# Altium PCB 175-00017_rev2, Two Axis Stepper Driver Apps Board.PcbDoc
Units mil, origin at the board's own origin, x right, y up, seen from the top; angles counter-clockwise.
Board outline 1377.95 x 3149.61 mil, 6 copper layers (Top (*.GTL), GND1 (*.GP1), Mid-Layer 1 (*.G1), +48V (*.GP2), GND2(*.GP3), Bottom Layer (*.GBL)); 16 components, 41 nets, 198 pads, 75 vias.
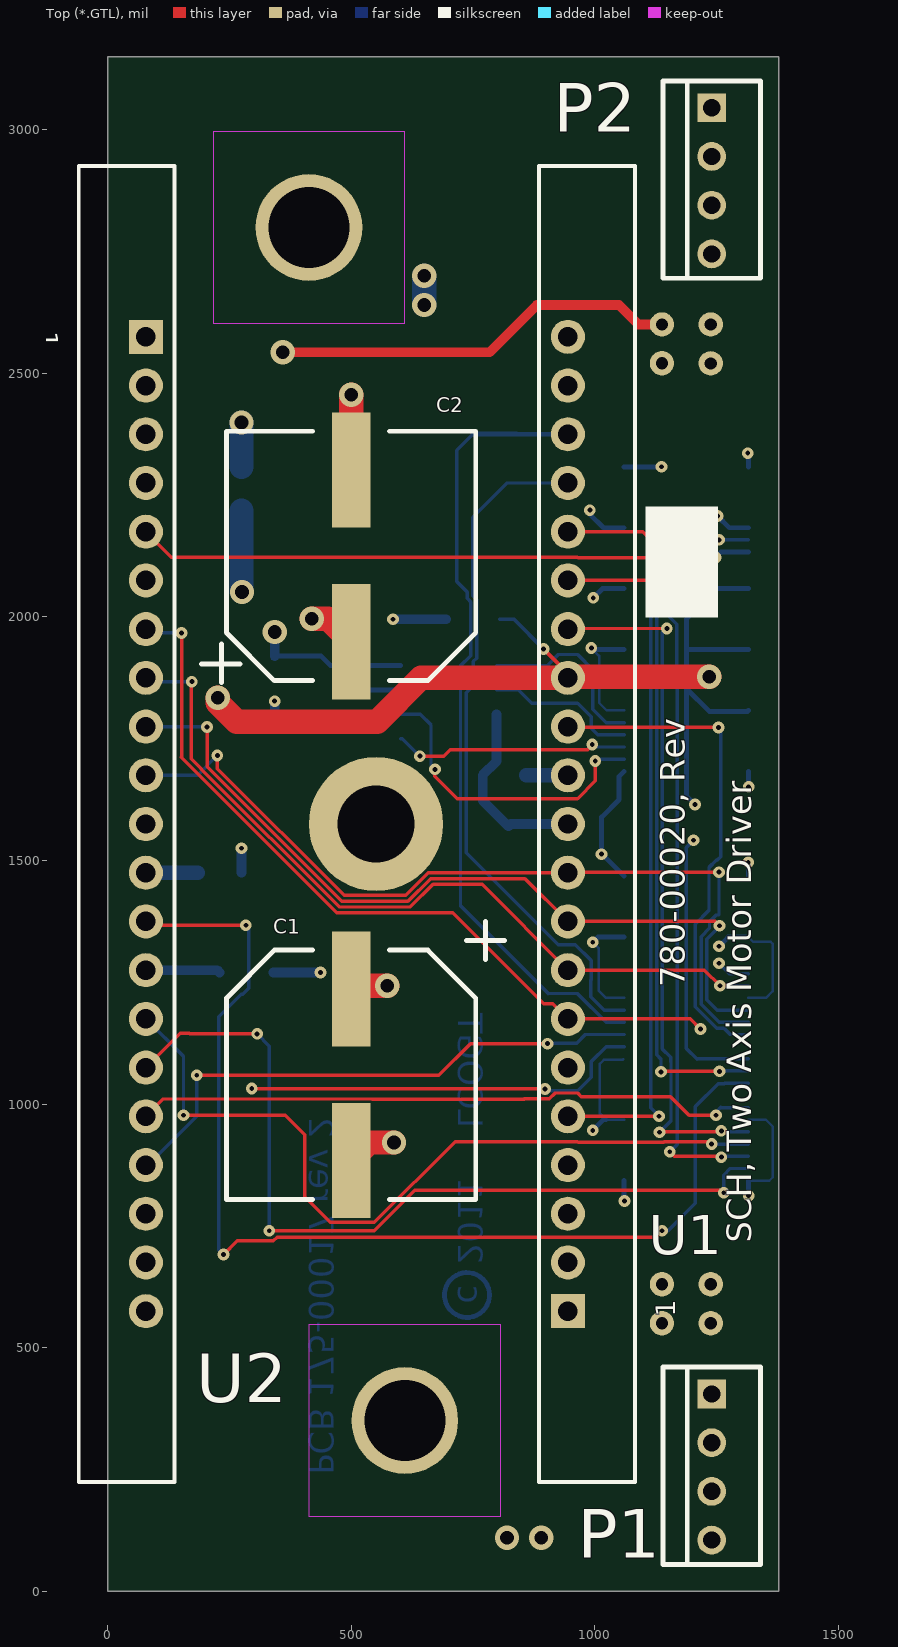
[diagram p0: Top (*.GTL) view]
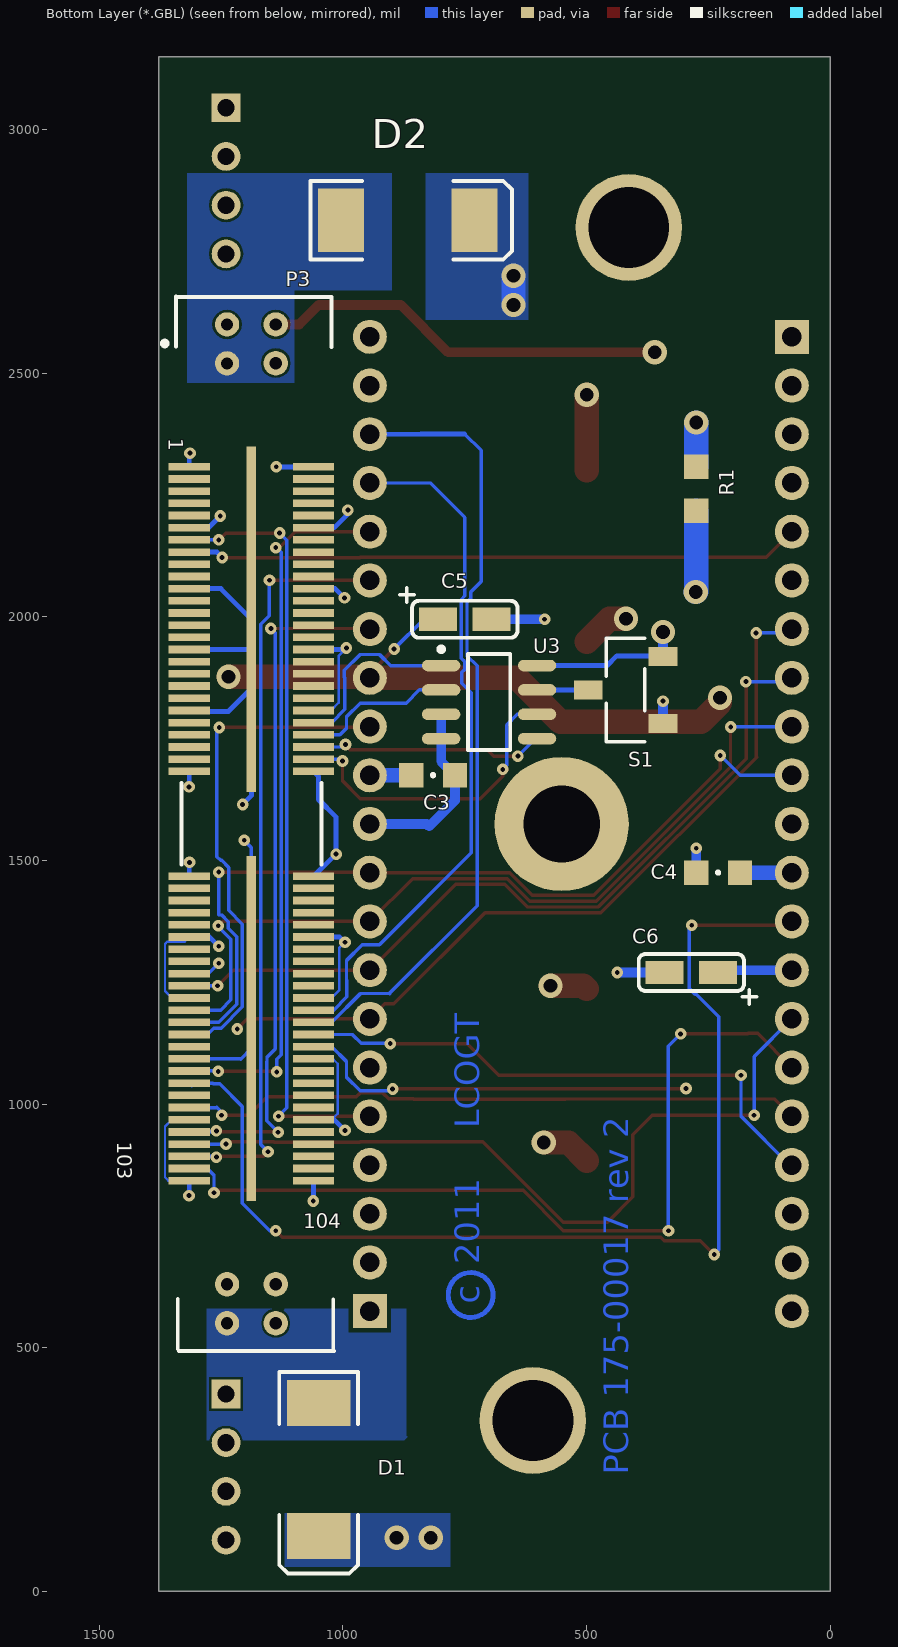
[diagram p1: Bottom Layer (*.GBL) view, seen from below]
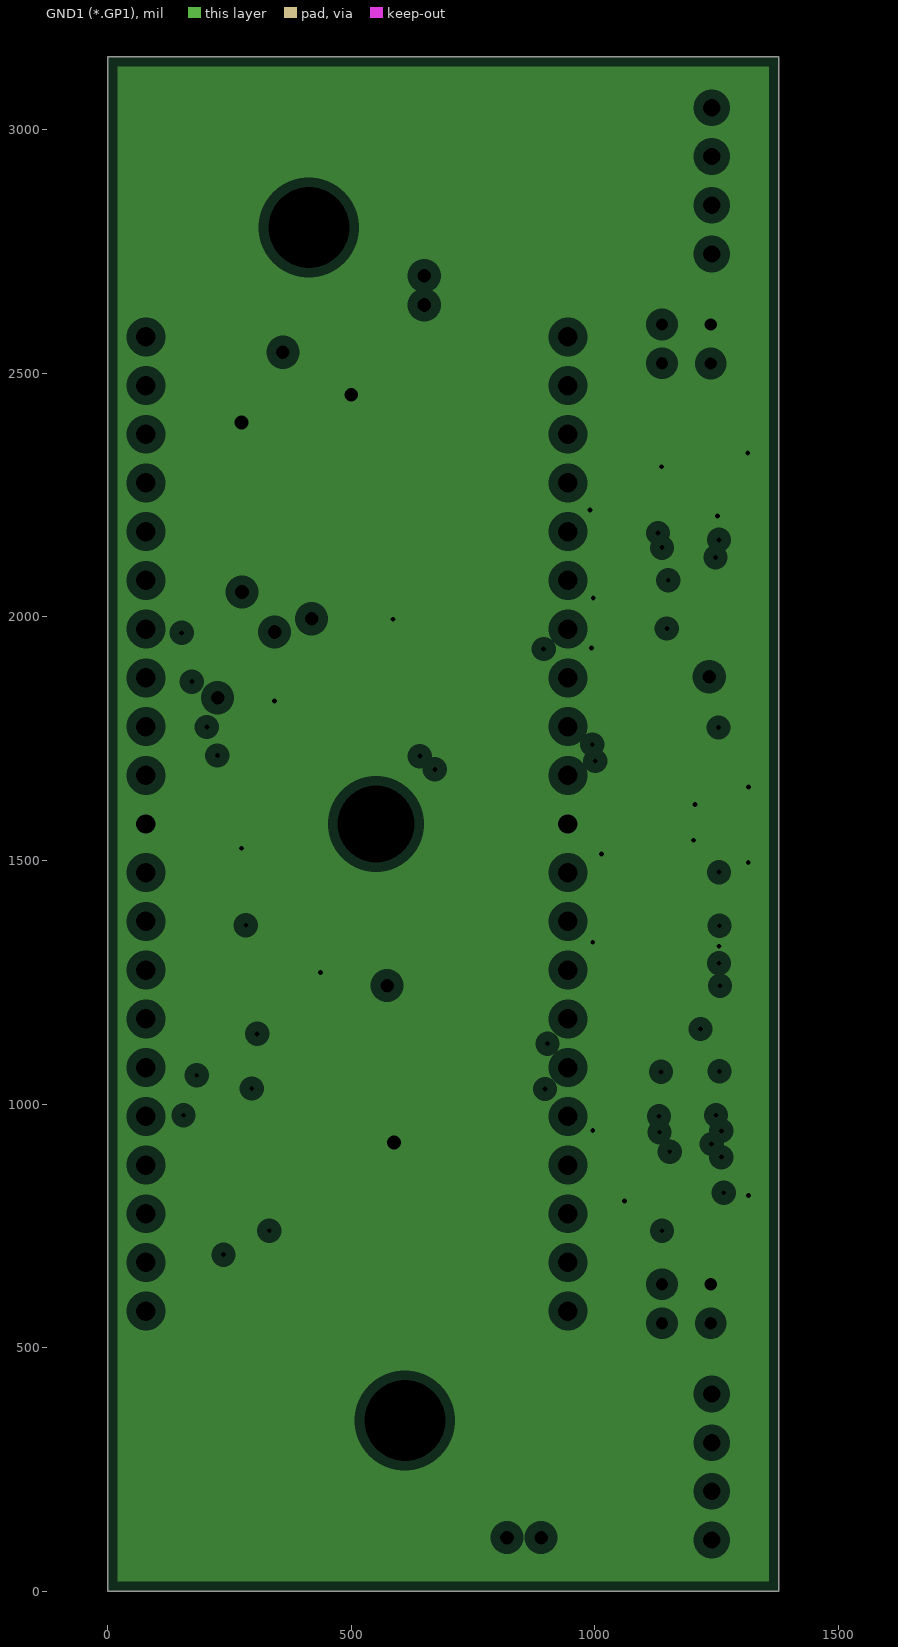
[diagram p2: GND1 (*.GP1), clearances drawn from the general rule]
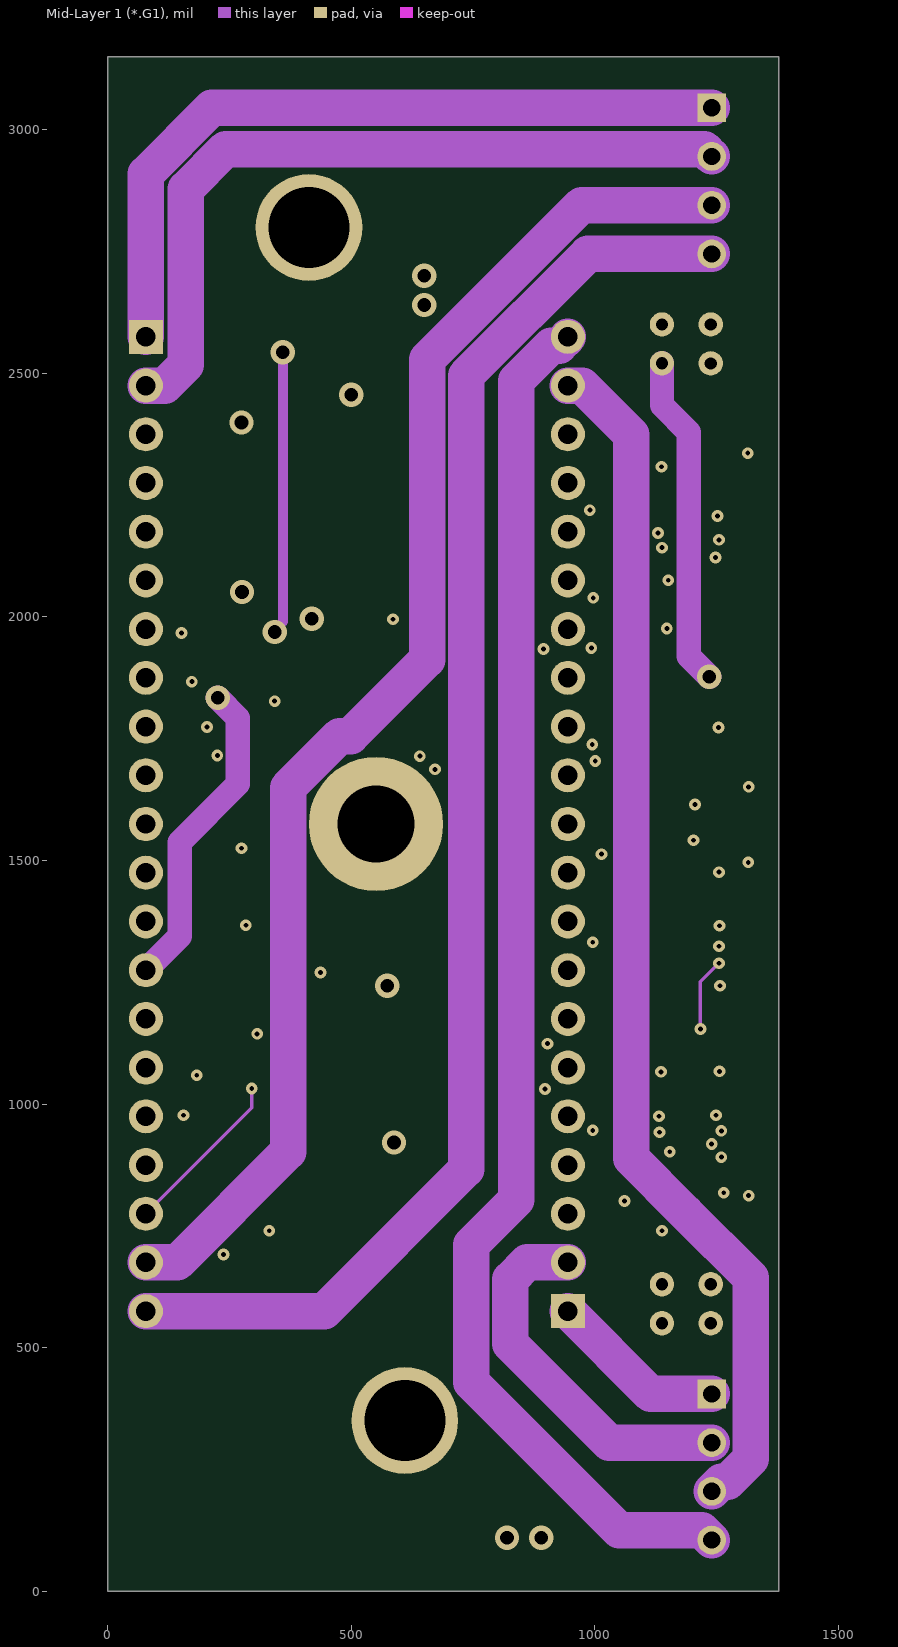
[diagram p3: Mid-Layer 1 (*.G1)]
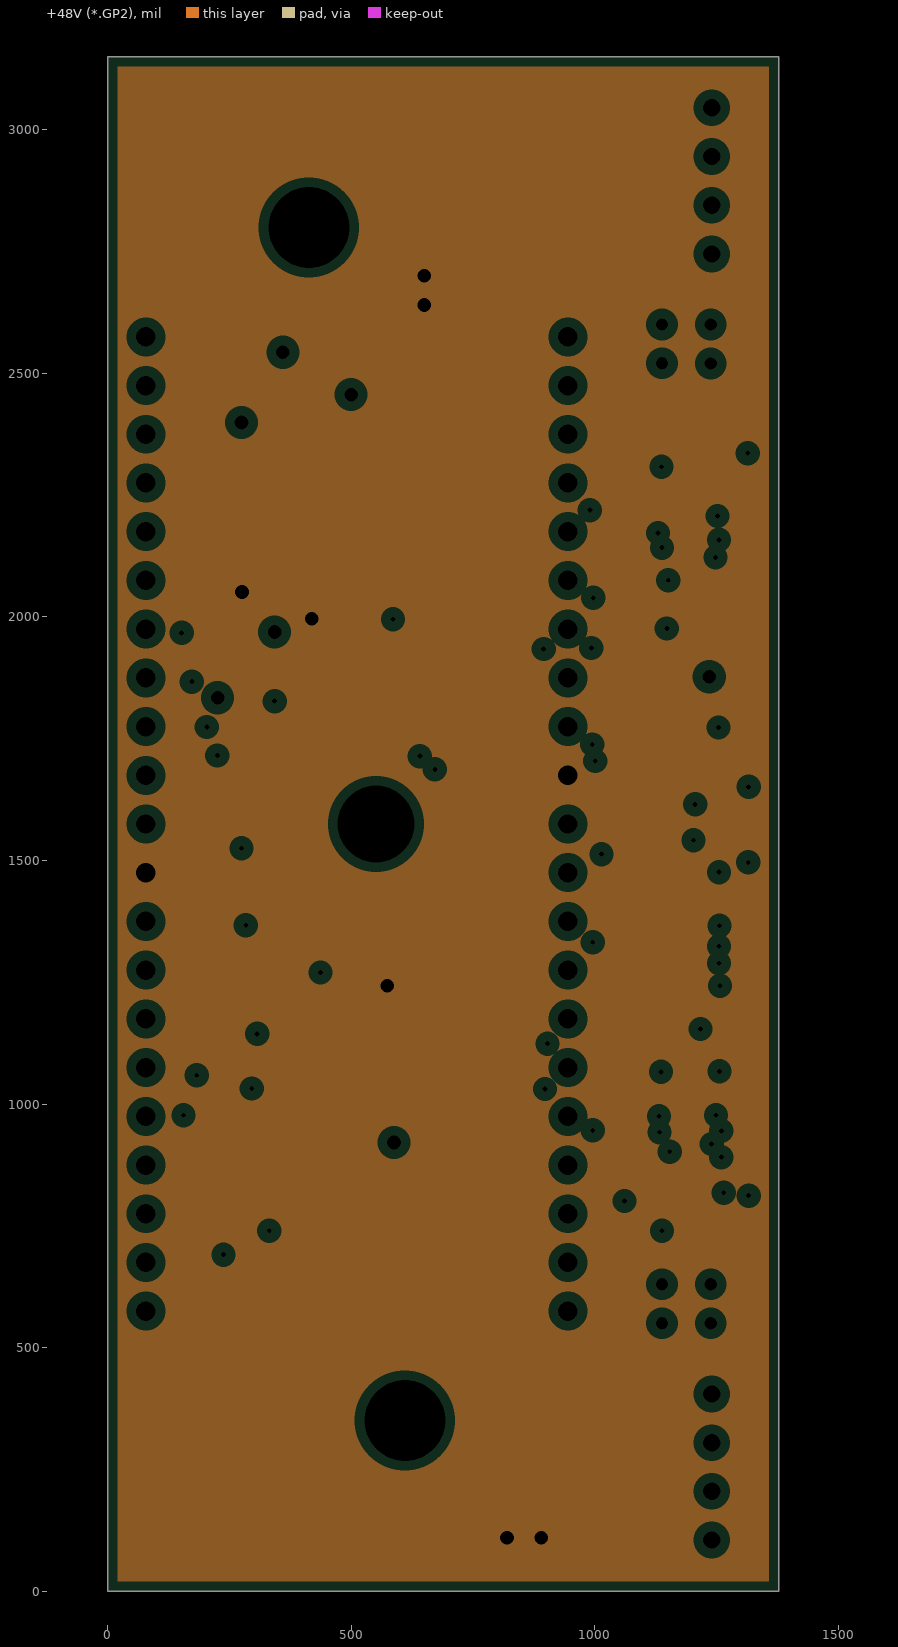
[diagram p4: +48V (*.GP2), clearances drawn from the general rule]
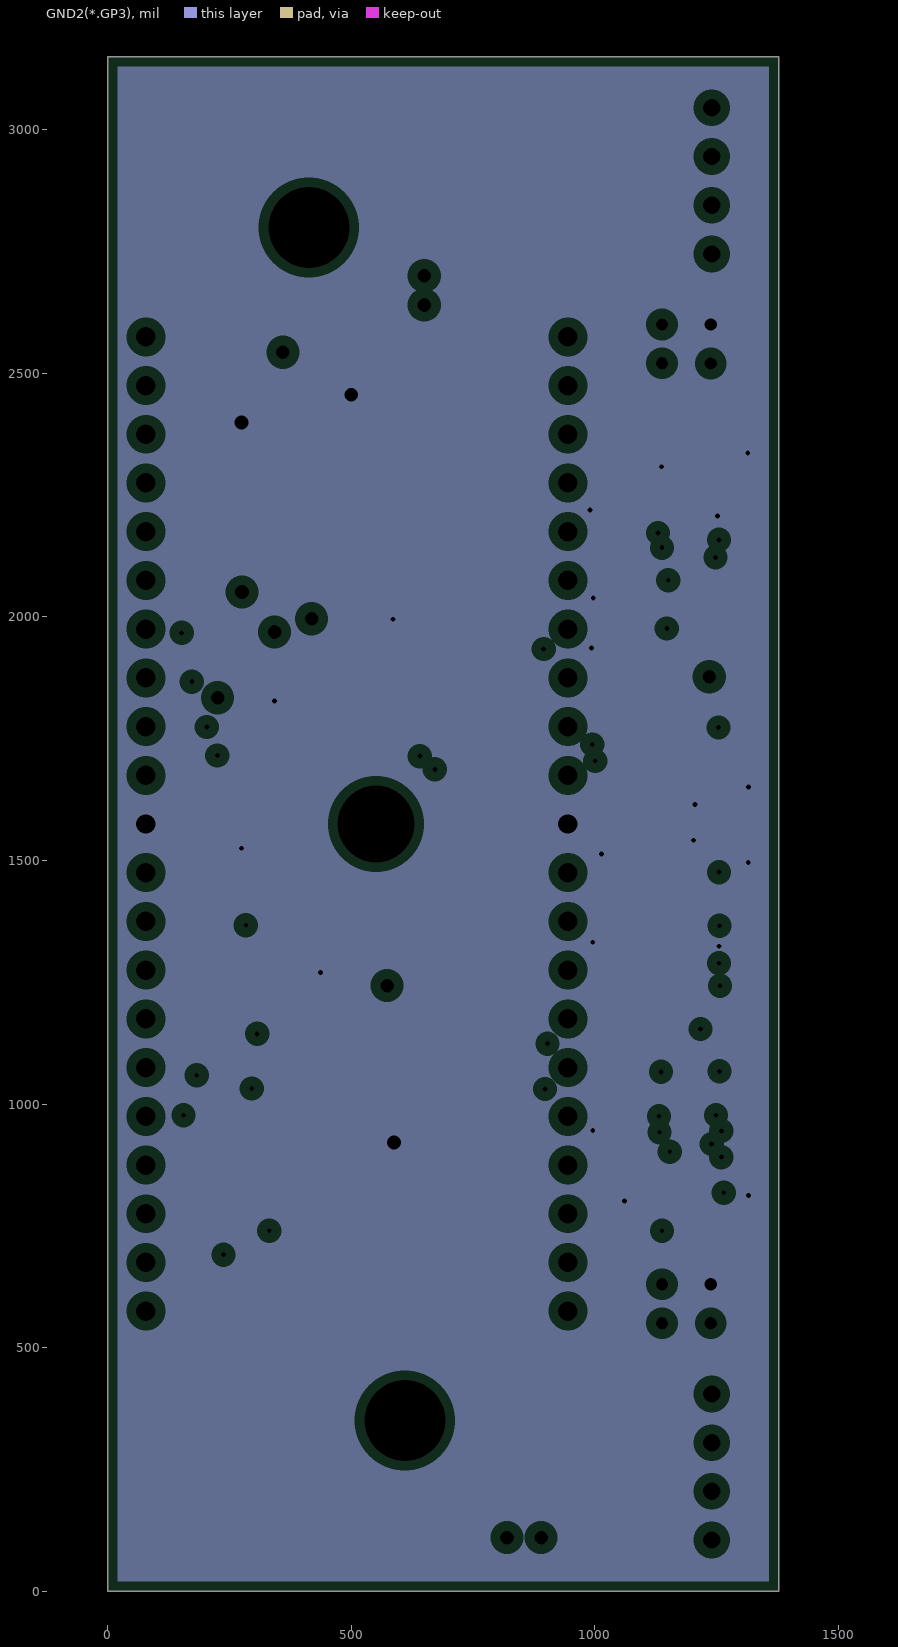
[diagram p5: GND2(*.GP3), clearances drawn from the general rule]

## Layer stack, top to bottom
Top (*.GTL): signal copper 1.4
Dielectric: core 12.6, FR-4, Dk 4.8
GND1 (*.GP1): plane copper 1.4, net GND
Dielectric: prepreg 12.6, FR-4, Dk 4.8
Mid-Layer 1 (*.G1): signal copper 2.8
Dielectric: core 12.6, FR-4, Dk 4.8
+48V (*.GP2): plane copper 2.8, net +48V
Dielectric: prepreg 12.6, FR-4, Dk 4.8
GND2(*.GP3): plane copper 1.4, net GND
Dielectric: core 12.6, FR-4, Dk 4.8
Bottom Layer (*.GBL): signal copper 1.4

## Board outline
0,0 0,3149.61 1377.95,3149.61 1377.95,0

## Design rules (kind name [scope] priority, off if disabled: settings)
Clearance [All] p1: gap=5
ComponentClearance [All] p1: gap=-3937.01 collisioncheckmode=3 verticalgap=-787.4 showdistances=FALSE
HoleSize [All] p1: absolutevalues=TRUE maxlimit=250 minlimit=1 maxpercent=80.000 minpercent=20.000
MinimumSolderMaskSliver [All] p1: minsoldermaskwidth=1
PlaneClearance [All] p1: clearance=20
PlaneConnect PlaneConnect_24/48 [InNet('+24/48V')] p1: planeconnectstyle=Direct reliefexpansion=20 reliefentries=2 reliefconductorwidth=10 reliefairgap=10
PlaneConnect [All] p2: planeconnectstyle=Relief reliefexpansion=20 reliefentries=4 reliefconductorwidth=10 reliefairgap=10
PolygonConnect [All] p1: connectstyle=Direct reliefconductorwidth=10 reliefentries=4 polygonreliefangle="90 Angle"
RoomDefinition "780-00020, rev 2, pg1, Two Axis Stepper Driver" [InComponentClass('780-00020, rev 2, pg1, Two Axis Stepper Driver')] p1: confinementstyle=ConfineIn formatcopy=TRUE lockcomponents=FALSE outline -3728.76,-3484.06 5072.24,-3484.06 5072.24,6627.94 -3728.76,6627.94
RoutingVias [All] p1: holewidth=28 width=50 viastyle="Through Hole" minholewidth=10 minwidth=24 maxholewidth=28 maxwidth=50
SilkToSilkClearance [All] p1: silktosilkclearance=1
SilkscreenOverComponentPads [All] p1: minsilkscreentomaskgap=1
SolderMaskExpansion [All] p1: expansion=4
Width [All] p1: maxlimit=100 minlimit=5 preferedwidth=10
21 further rules are at their usual default settings.

## Components (designator, comment, footprint, x,y, rotation, side; value= is the part's Value field where it differs from the comment)
C1 "63V" "CAP 220uF 63V" 500,1060 r0 top
C2 "63V" "CAP 220uF 63V" 500,2125 r180 top
C3 "100V" SMD_0805 815,1675 r0 bottom
C4 "100V" SMD_0805 230,1475 r180 bottom
C5 "10V" SMD_CAP_3216 750,1995 r0 bottom
C6 "10V" SMD_CAP_3216 285,1270 r180 bottom
D1 "S5BC-13-F" SMC 1050,250 r270 bottom
D2 "S5BC-13-F" SMC 867,2814 r180 bottom
P1 "Header 4" "HDR1X4 for IDC" 1240,405 r270 top
P2 "Header 4" "HDR1X4 for IDC" 1240,3045 r270 top
P3 "QMSS-052-06.75-L-D-PC4" "QMS SMD PWR PINS - 104PIN" 1187.99,1575.17 r270 bottom
R1 "Res 0805" SMD_0805 275,2263 r270 bottom
S1 "CJS-1200TB" CAS-120B 420,1850 r90 bottom
U1 "IM481H Plus" "IM481H VERTICAL" 944.88,1574.8 r90 top
U2 "IM481H Plus" "IM481H VERTICAL" 78.74,1574.8 r270 top
U3 "M24C32RMN1" SOP8_N 700,1825 r180 bottom

## Footprints (in the part's own frame and the unit in brackets; to place one, negate y for a bottom-side part, rotate by r counter-clockwise, add the part's x,y. Pads: shape width x height; smd on the part's side, far side on the other; paste and mask are expansions set on the pad)
"CAP 220uF 63V" [mm] "United Chemi-Con size KG5"
  rect 2x6 smd: 1(0,4.475) 2(0,-4.475)
  silkscreen extent -6.5,-6.5 8,8
CAS-120B [mm] "Copal Electronics CAS SMD Slide Switch"
  rect 1x1.5 smd: 1(-1.75,-1.95) 2(0,1.95) 3(1.75,-1.95)
  silkscreen extent -2.69,-1 2.69,1
"HDR1X4 for IDC" [mm] "Connector; Header; 4 Position"
  rect 1.5x1.5 hole 0.9: 1(0,0)
  round 1.5 hole 0.9: 2(2.54,0) 3(5.08,0) 4(7.62,0)
  silkscreen extent -1.4,-2.54 8.89,2.54
"IM481H VERTICAL" [mil] "Stepper motor driver"
  round 218.9 hole 166.14: 0(-1224.41,334.65)
  rect 70x70 hole 40: 1(-1000,0)
  round 70 hole 40: 2(-900,0) 3(-800,0) 4(-700,0) 5(-600,0) 6(-500,0) 7(-400,0) 8(-300,0) 9(-200,0) 10(-100,0) 11(0,0) 12(100,0) 13(200,0) 14(300,0) 15(400,0) 16(500,0) 17(600,0) 18(700,0) 19(800,0) 20(900,0) 21(1000,0)
  Top (*.GTL) keep-out region: -1027.56,531.5 -1421.26,531.5 -1421.26,137.8 -1027.56,137.8 -1027.56,334.65
  silkscreen extent -1350,-138 1350,59
"QMS SMD PWR PINS - 104PIN" [mm] "52pos (104 pin) + 8 pwr pins"
  rect 0.4x2.15 smd mask+0: 1(-18.612,-3.24) 2(-18.612,3.24) 3(-17.977,-3.24) 4(-17.977,3.24) 5(-17.342,-3.24) 6(-17.342,3.24) 7(-16.707,-3.24) 8(-16.707,3.24) 9(-16.072,-3.24) 10(-16.072,3.24) 11(-15.437,-3.24) 12(-15.437,3.24) 13(-14.802,-3.24) 14(-14.802,3.24) 15(-14.167,-3.24) 16(-14.167,3.24) 17(-13.532,-3.24) 18(-13.532,3.24) 19(-12.897,-3.24) 20(-12.897,3.24) 21(-12.262,-3.24) 22(-12.262,3.24) 23(-11.627,-3.24) 24(-11.627,3.24) 25(-10.992,-3.24) 26(-10.992,3.24) 27(-10.357,-3.24) 28(-10.357,3.24) 29(-9.722,-3.24) 30(-9.722,3.24) 31(-9.087,-3.24) 32(-9.087,3.24) 33(-8.452,-3.24) 34(-8.452,3.24) 35(-7.817,-3.24) 36(-7.817,3.24) 37(-7.182,-3.24) 38(-7.182,3.24) 39(-6.547,-3.24) 40(-6.547,3.24) 41(-5.912,-3.24) 42(-5.912,3.24) 43(-5.277,-3.24) 44(-5.277,3.24) 45(-4.642,-3.24) 46(-4.642,3.24) 47(-4.007,-3.24) 48(-4.007,3.24) 49(-3.372,-3.24) 50(-3.372,3.24) 51(-2.737,-3.24) 52(-2.737,3.24) 53(2.728,-3.24) 54(2.728,3.24) 55(3.363,-3.24) 56(3.363,3.24) 57(3.998,-3.24) 58(3.998,3.24) 59(4.633,-3.24) 60(4.633,3.24) 61(5.268,-3.24) 62(5.268,3.24) 63(5.903,-3.24) 64(5.903,3.24) 65(6.538,-3.24) 66(6.538,3.24) 67(7.173,-3.24) 68(7.173,3.24) 69(7.808,-3.24) 70(7.808,3.24) 71(8.443,-3.24) 72(8.443,3.24) 73(9.078,-3.24) 74(9.078,3.24) 75(9.713,-3.24) 76(9.713,3.24) 77(10.348,-3.24) 78(10.348,3.24) 79(10.983,-3.24) 80(10.983,3.24) 81(11.618,-3.24) 82(11.618,3.24) 83(12.253,-3.24) 84(12.253,3.24) 85(12.888,-3.24) 86(12.888,3.24) 87(13.523,-3.24) 88(13.523,3.24) 89(14.158,-3.24) 90(14.158,3.24) 91(14.793,-3.24) 92(14.793,3.24) 93(15.428,-3.24) 94(15.428,3.24) 95(16.063,-3.24) 96(16.063,3.24) 97(16.698,-3.24) 98(16.698,3.24) 99(17.333,-3.24) 100(17.333,3.24) 101(17.968,-3.24) 102(17.968,3.24) 103(18.603,-3.24) 104(18.603,3.24)
  rect 18x0.5 smd mask+0: 105(-10.672,0) 106(10.668,0)
  round 1.27 hole 0.635 mask+0: PC01(-26.035,-1.27) PC02(-26.035,1.27) PC03(-24.003,-1.27) PC04(-24.016,1.27) PC05(24.003,-1.27) PC06(24.003,1.27) PC07(26.035,-1.27) PC08(26.035,1.27)
  silkscreen extent -27.49,-4.65 27.48,4.32
SMC [mm] "DO-214-AB/SMC; 2 C-Bend Leads; Body 7.9 x 5.9 mm, inc. leads (LxW)"
  rect 2.4x3.3 smd: 1(-3.475,0) 2(3.475,0)
  silkscreen extent -5.07,-2.05 5.43,2.05
SMD_0805 [mil]
  rect 50x50 smd: 1(-45,0) 2(45,0)
  silkscreen extent -1,-1 1,1
SMD_CAP_3216 [mil]
  rect 78x48 smd: 1(55,0) 2(-55,0)
  silkscreen extent -108,-65 134,38
SOP8_N [mm] "SOIC, 8-Leads, Body 4.9x3.9mm, Pitch 1.27mm, IPC Medium Density"
  oval 2x0.6 smd: 1(-2.5,1.905) 2(-2.5,0.635) 3(-2.5,-0.635) 4(-2.5,-1.905) 5(2.5,-1.905) 6(2.5,-0.635) 7(2.5,0.635) 8(2.5,1.905)
  silkscreen extent -2.63,-2.5 1.1,2.88, body extent -2,-2.5 2,2.5, height 1.75

## Part data
C1 C2: library part "Cap 220uF, 63V", "CAP 220UF 63V ELECT MVH SMD"
C3 C4: library part "Cap SMD", "Capacitor"
C5 C6: library part "Cap Tant 16V", "outline 3.2mm x 1.6mm"
D1 D2: library part Diode, "Default Diode"
P1 P2: "Header, 4-Pin"
P3: library part "QMSS-PC4-104 pin", "SAMTEC QMSS W/PWR PINS"
R1: library part "Res SMD", "Resistor 0805"
S1: library part SW_SPDT_DOUG
U1 U2: "Hybrid stepper motor driver"
U3: "32 Kbit Serial I²C Bus EEPROM"

## Free pads (board coordinates)
  round 218.9 hole 166.14: 0(413.39,2799.21) 0(610.24,350.39)
  round 275.59 hole 157.48: 0(551.18,1574.8)

## Via types
v1: diameter 24, hole 10, Top (*.GTL) to Bottom Layer (*.GBL), 61 vias
v2: diameter 50, hole 28, Top (*.GTL) to Bottom Layer (*.GBL), 14 vias

## Nets (pads, with @x,y where several pads share a name; then routed paths per layer and width w, separated by ;. In a path a pad name is that pad's centre, name@x,y a point inside that pad or via, vN(x,y) a via of type N, cw(c..) or ccw(c..) an arc to the next point about the centre after c; other vN are vias at no path point)
+3.3V: P3.PC02 S1.3 U3.8 | length 1733
  Top (*.GTL) w20: v2(360,2543) 784.16,2543 881.17,2640.01 1049.99,2640.01 1089.83,2600.17 P3.PC02
  Mid-Layer 1 (*.G1) w20: v2(343,1969) 343,1973 360,1990 v2(360,2543)
  Bottom Layer (*.GBL) w10: S1.3 344.33,1920 438,1920 458,1900 U3.8
  Bottom Layer (*.GBL) w20: v2(343,1969) 343,1919.13 S1.3
+5V: C5.1 C6.1 P3.PC04 U1.14 U2.14 | length 2760.1
  Top (*.GTL) w8: v1(895,1934) 944.88,1884.12 U1.14
  Top (*.GTL) w50: v2(226,1834) 226,1824 265,1785 553.66,1785 643.46,1874.8 U1.14 947.08,1877 v2(1235,1877)
  Mid-Layer 1 (*.G1) w50: U2.14 148.11,1344.17 148.11,1537.4 267.5,1656.79 267.5,1792.5 v2(226,1834) ; P3.PC04 1137.99,2434.23 1193,2379.22 1193,1919 v2(1235,1877)
  Bottom Layer (*.GBL) w8: C5.1 834,1995 v1(895,1934)
  Bottom Layer (*.GBL) w20: U2.14 225.2,1274.8 C6.1
+12V: P3.PC06
+24/48V: C1.1 C2.1 C3.2 C4.2 D1.2 D2.2 R1.2 U1.12 U2.12 | length 596.1
  Top (*.GTL) w50: v2(419,1996) 452.82,1996 C2.1 ; C1.1 506.82,1243 v2(574,1243)
  Bottom Layer (*.GBL) w30: U2.12 78.94,1475 C4.2 ; C3.2 944.69,1675 U1.12
  Bottom Layer (*.GBL) w50: R1.2 275,2052 v2(276,2051) ; v2(650,2640) v2(650,2700)
  other v2: 820,110 890,110
+24V: D1.1 P3.PC07
+48V: D2.1 P3.PC03
-12V: P3.PC08
DAC_OUT0: P3.13 U1.5 | length 1588.8
  Top (*.GTL) w7: U1.5 1131.8,974.8 v1(1132,975) ; v1(1130,2172) 1241,2172 v1(1255,2158)
  Bottom Layer (*.GBL) w7: v1(1130,2172) 1115,2157 1115,992 v1(1132,975) ; v1(1255,2158) 1315.47,2158 P3.13
DAC_OUT1: P3.15 U2.5 | length 1263.6
  Top (*.GTL) w7: U2.5 130.87,2122.67 964.71,2122.67 965.88,2121.5 1247.5,2121.5 v1(1248,2122)
  Bottom Layer (*.GBL) w10: v1(1248,2122) 1258.92,2132.92 P3.15
DIRECTION1: P3.99 U1.16 | length 1558.2
  Top (*.GTL) w7: U1.16 1150.8,2074.8 v1(1151,2075) ; v1(1154,902) 1163,893 v1@1259,893
  Bottom Layer (*.GBL) w7: v1(1151,2075) 1151,2001.99 1168.5,1984.49 1168.5,1897.5 1169,1897 1169,949 1169,917 v1(1154,902) ; v1@1259,893 1259.24,892.76 P3.99
  other v1: 1259.95,891
DIRECTION2: P3.101 U2.16 | length 1733.6
  Top (*.GTL) w7: U2.16 148.94,1145 168,1145 169,1144 v1(307,1144) ; v1(332,740) 547.63,740 630.31,822.67 1260.06,822.67 v1(1264.73,818)
  Bottom Layer (*.GBL) w7: v1(307,1144) 332,1119 v1(332,740) ; v1(1264.73,818) 1264.73,854.16 1278.33,867.76 P3.101
GND: C1.2 C2.2 C3.1 C4.1 C5.2 C6.2 P3.1 P3.2 P3.11 P3.12 P3.21 P3.22 P3.31 P3.32 P3.41 P3.42 P3.51 P3.52 P3.53 P3.54 P3.63 P3.64 P3.73 P3.74 P3.83 P3.84 P3.93 P3.94 P3.103 P3.104 P3.105 P3.106 P3.PC01 P3.PC05 R1.1 S1.1 U1.11 U2.11 U3.3 U3.4 | length 4366.7
  Top (*.GTL) w50: C1.2 537.18,921 v2(588,921) ; C2.2 v2(500,2456)
  Bottom Layer (*.GBL) w5: v1@992.95,1936 1008.95,1920 1008.95,1823.6 1024.63,1807.92 P3.42 ; v1@996.95,1331 1007.95,1320 1007.95,1233 1023.19,1217.76 P3.74 ; P3.84@1058.95,1092 1057.95,1091 1018.95,1091 1010.61,1082.66 1010.61,980.34 1023.19,967.76 P3.94 ; P3.103 1358.02,842.76 1358.27,842.52 1365.37,849.63 1365.37,953.74 1351.35,967.76 P3.93 ; P3.73 1351.35,1217.76 1365.37,1231.78 1365.37,1328.74 1360.98,1333.14 1325.18,1333.14 P3.63
  Bottom Layer (*.GBL) w7: v1(1202.76,1541.34) 1187.99,1526.57 P3.106 1187.99,1114.01 1210,1092 1210.76,1092.76 P3.83
  Bottom Layer (*.GBL) w10: v1(990,2219) 990,2211 1018.08,2182.92 P3.12 ; v1(993,1936) 996.08,1932.92 P3.32 ; v1(996,946) 1017.76,967.76 P3.94@1023.19,967.76 ; v1(996,1332) 1006.76,1342.76 P3.64 ; v1(997,2039) 1015.92,2057.92 P3.22 ; P3.104 1060.43,801.57 v1(1061,801) ; P3.54 1015.2,1513 v1(1014,1513) 1014,1588.8 1050.2,1625 1050.2,1672.68 P3.52 ; P3.2 1136.92,2307.92 v1(1137,2308) ; v1(1206,1615) 1187.99,1633.01 P3.105@1187.99,1853.01 ; v1(1252,2207) 1276.08,2182.92 P3.11 ; v1(1255,1324) 1273.76,1342.76 P3.63 ; v1(1314,2336) 1315.55,2334.45 P3.1 ; v1(1315,1496) 1315.55,1495.45 P3.53 ; P3.103 1315.55,812.45 v1(1316,812) ; P3.51 1315.55,1651.45 v1(1316,1651) ; P3.41 1313.63,1806 1235,1806 P3.105@1187.99,1853.01 ; P3.31 1189.07,1932.92 P3.105@1187.99,1934 ; P3.21 1250.59,2057.92 P3.105 P3.105@1187.99,1934 ; P3.105@1187.99,1853.01 P3.105@1187.99,1934
  Bottom Layer (*.GBL) w20: C4.1 v1(275,1525) ; C6.2 436,1270 437,1271 v1(437,1270) ; v1(343,1827) 343.23,1826.77 S1.1 ; v1(586,1995) C5.2 ; U3.3 U3.4 798.43,1703.43 C3.1 770,1623 823,1570 827.8,1574.8 U1.11
  Bottom Layer (*.GBL) w50: R1.1 v2(275,2399)
GP_OUT_D6: P3.69 U1.7 U2.7 | length 1849
  Top (*.GTL) w7: v1(152,1967) 152,1713 151.04,1712.04 470.58,1392.51 708.5,1392.51 895.51,1205.5 914.19,1205.5 U1.7 1196.2,1174.8 v1(1217,1154)
  Mid-Layer 1 (*.G1) w7: v1(1217,1154) 1217,1251 v1(1255,1289)
  Bottom Layer (*.GBL) w7: U2.7 86.54,1967 v1(152,1967) ; v1(1255,1289) 1276.24,1267.76 P3.69
GP_OUT_D7: P3.71 U1.8 U2.8 | length 1631.5
  Top (*.GTL) w7: v1(173,1867) 172,1866 172,1708.99 192.5,1688.49 192.5,1687.56 475.55,1404.51 621.72,1404.51 668.01,1450.8 768.88,1450.8 U1.8 1225.2,1274.8 v1(1257.24,1242.76) v1@1263,1242.76
  Bottom Layer (*.GBL) w7: U2.8 86.54,1867 v1(173,1867) ; v1@1263,1242.76 P3.71
GP_OUT_D8: P3.75 U1.9 U2.9 | length 1690
  Top (*.GTL) w7: v1(204,1774) 204.5,1773.5 204.5,1692.53 480.52,1416.51 616.75,1416.51 663.04,1462.8 856.88,1462.8 U1.9 1247.2,1374.8 v1(1256,1366)
  Bottom Layer (*.GBL) w7: U2.9 79.54,1774 v1(204,1774) ; v1(1256,1366) 1257,1365 1230.33,1338.33 1230.33,1213.67 1251.24,1192.76 P3.75
GP_OUT_D9: P3.77 U1.10 U2.10 | length 1753.6
  Top (*.GTL) w7: v1@226,1716 v1(225.5,1715.5) 225.5,1688.5 485.49,1428.51 611.78,1428.51 658.07,1474.8 U1.10 946.08,1476 v1(1255,1476)
  Bottom Layer (*.GBL) w7: U2.10 184.8,1674.8 v1(225.5,1715.5) ; v1@1257,1478 v1(1255,1476) 1255,1388 1249.01,1388 1235.5,1374.49 1235.5,1360.47 1218.33,1343.31 1218.33,1204.67 1255.24,1167.76 P3.77
GP_OUT_D10: P3.79 U1.13 | length 1044
  Top (*.GTL) w7: U1.13 946.69,1773 v1(1254,1773)
  Bottom Layer (*.GBL) w7: v1(1254,1773) 1259,1773 1259,1508 1251,1500 1249,1500 1234.5,1485.5 1234.5,1397.5 1206.33,1369.33 1206.33,1199.69 1250.27,1155.76 1265.33,1155.76 1278.33,1142.76 P3.79
GP_OUT_D11: P3.81
GP_OUT_D12: P3.85 U1.17 | length 1477.7
  Top (*.GTL) w7: U1.17 1098.21,2174.8 1131.01,2142 v1(1138,2142) ; v1(1136,1066) 1137,1067 v1(1256,1067)
  Bottom Layer (*.GBL) w7: v1(1136,1066) 1136,1092 1127,1101 1127,2133 1136,2142 v1(1138,2142) ; v1(1256,1067) 1257,1068 1313,1068 1316,1071 1316,1068.21 P3.85
GP_OUT_D13: P3.87 U2.13 | length 2264.9
  Top (*.GTL) w7: U2.13 86.54,1367 v1(284,1367) ; v1(238,691) 266.5,719.5 340.49,719.5 347.92,726.93 1124.93,726.93 v1(1138,740)
  Bottom Layer (*.GBL) w7: v1(238,691) 228.58,700.42 228.58,1179.58 274.5,1225.5 277.49,1225.5 289.5,1237.51 289.5,1361.5 v1(284,1367) ; v1(1138,740) 1150.33,740 1206.33,796 1206.33,995 1253.33,1042 1266,1042 1266.76,1042.76 P3.87 P3.87@1310.29,1037.5
GP_OUT_D14: P3.89
GP_OUT_D15: P3.91 U2.17 | length 1323.4
  Top (*.GTL) w7: U2.17 114.37,1010.43 542.89,1010.43 543.32,1010 855,1010 855.5,1010.5 906.49,1010.5 918.66,1022.67 964.71,1022.67 972.38,1015 1155.5,1015 1193.5,977 v1(1249,977)
  Bottom Layer (*.GBL) w7: v1(1249,977) 1249,983 1259,993 1259.24,992.76 P3.91 P3.91@1278.33,992.76
I2C_SCL: P3.50 U3.6 | length 648.5
  Top (*.GTL) w7: v1@664,1686 663,1686 671.95,1677.05 671.95,1673.05 718.07,1626.93 964.71,1626.93 1001,1663.22 v1(1001,1704)
  Bottom Layer (*.GBL) w7: U3.6 642,1800 664,1778 664,1694.95 v1(671.95,1687) ; v1(1001,1704) 1004.92,1707.92 P3.50
I2C_SDA: P3.48 U3.5 | length 488.2
  Top (*.GTL) w7: v1(641,1714) 690.53,1714 703.46,1726.93 985.93,1726.93 995,1736 994.95,1736.05 v1(994.95,1738)
  Bottom Layer (*.GBL) w7: U3.5 605,1750 v1(641,1714) ; v1(994.95,1738) 994.95,1736.05 998.08,1732.92 P3.48
NetP1_1: P1.1 U1.1 | length 365.5
  Mid-Layer 1 (*.G1) w75: U1.1 1114.69,405 P1.1
NetP1_2: P1.2 U1.2 | length 762
  Mid-Layer 1 (*.G1) w75: U1.2 861.38,674.8 826.77,640.19 826.77,507.87 1029.65,305 P1.2
NetP1_3: P1.3 U1.20 | length 2483.1
  Mid-Layer 1 (*.G1) w75: U1.20 974.02,2474.8 1074.8,2374.02 1074.8,888.81 1186.81,776.81 1320,643.62 1320,271.86 1273.14,225 1260,225 P1.3
NetP1_4: P1.4 U1.21 | length 2864.7
  Mid-Layer 1 (*.G1) w75: U1.21 926.75,2556.67 910.97,2556.67 838.58,2484.29 838.58,803.15 746.77,711.34 746.77,428.75 1050.52,125 1220,125 P1.4
NetP2_1: P2.1 U2.1 | length 1552.1
  Mid-Layer 1 (*.G1) w75: U2.1 78.74,2909.45 214.29,3045 P2.1
NetP2_2: P2.2 U2.2 | length 1579.5
  Mid-Layer 1 (*.G1) w75: U2.2 117.58,2474.8 160.61,2517.83 160.61,2878.18 242.36,2959.94 1225.06,2959.94 P2.2
NetP2_3: P2.3 U2.20 | length 2858.7
  Mid-Layer 1 (*.G1) w75: U2.20 143.31,674.8 370.89,902.38 370.89,1649.48 476.5,1755.1 499.19,1755.1 656.22,1912.13 656.22,2528.2 973.02,2845 P2.3
NetP2_4: P2.4 U2.21 | length 3014.4
  Mid-Layer 1 (*.G1) w75: U2.21 444.88,574.8 736.22,866.14 736.22,2495.06 986.16,2745 P2.4
NetS1_2: S1.2 U3.7 | length 104.8
  Bottom Layer (*.GBL) w10: S1.2 U3.7
OPTO_INPUT_8: P3.76 U1.18 | length 1431.5
  Bottom Layer (*.GBL) w7: U1.18 820.8,2274.8 750,2204 750,2043 757.5,2035.5 757.5,1915.36 750.56,1908.41 750.56,1891.44 756,1886 756,1863.86 736.5,1844.36 736.5,1515.49 925.05,1326.93 960.45,1326.93 992.75,1294.63 992.75,1254.97 991.95,1254.18 991.95,1220.05 1019.24,1192.76 P3.76
OPTO_INPUT_9: P3.78 U1.19 | length 1633.7
  Bottom Layer (*.GBL) w7: 750,2375 716.5,2341.5 716.5,2072.5 738,2051 738,2038.03 745.5,2030.53 745.5,1920.33 724.5,1899.33 724.5,1407.37 904.93,1226.93 ; 904,1226 904.93,1226.93 ; P3.78 1023.22,1167.76 964.05,1226.93 904.93,1226.93
  Bottom Layer (*.GBL) w10: 750,2375 840,2375 840.2,2374.8 U1.19
OPTO_INPUT_10: P3.80 U2.18 | length 1141.9
  Top (*.GTL) w7: v1(183,1059) 680,1059 745,1124 v1(903,1124)
  Bottom Layer (*.GBL) w7: U2.18 82.79,874.8 183,975.01 v1(183,1059) ; v1(903,1124) 904,1125 962.78,1125 980.54,1142.76 P3.80
OPTO_INPUT_11: P3.82 U2.19 | length 1173.8
  Top (*.GTL) w7: v1(296,1032) 297,1031 v1(898,1031) v1@902,1027
  Mid-Layer 1 (*.G1) w7: U2.19 296,992.06 v1(296,1032)
  Bottom Layer (*.GBL) w7: v1(296,1032) v1@298.5,1029.5 ; v1@902,1027 902.07,1026.93 964.71,1026.93 992.75,1054.97 992.75,1087.3 1023.22,1117.76 P3.82
SLOT_ID0: P3.44 U3.1 | length 377.7
  Bottom Layer (*.GBL) w7: U3.1 902.38,1900 925.05,1922.67 964.71,1922.67 997,1890.38 997,1876 996,1875 996,1810.14 1023.22,1782.92 P3.44
SLOT_ID1: P3.46 U3.2 | length 313.8
  Bottom Layer (*.GBL) w7: U3.2 843,1850 870.33,1822.67 893.92,1822.67 941.11,1822.67 964.71,1822.67 992.75,1794.63 992.75,1771.25 1006.08,1757.92 P3.46
STEP1: P3.95 U1.15 | length 1478.6
  Top (*.GTL) w7: U1.15 946.08,1976 v1(1148,1976) ; v1(1133,942) 1134,943 v1@1261,943
  Bottom Layer (*.GBL) w7: v1(1133,942) 1156.5,965.5 1156.5,1086.5 1156,1087 1156,1096 1139,1113 1139,1967 v1(1148,1976) ; v1@1261,943 1261.24,942.76 P3.95 P3.95@1278.33,942.76
  other v1: 1259.95,945
STEP2: P3.97 U2.15 | length 1666.3
  Top (*.GTL) w7: v1(156,977) 364.89,977 405,936.89 405,809.32 457.11,757.21 547.87,757.21 713.33,922.67 964.71,922.67 965.88,921.5 1141.49,921.5 1142.49,922.5 1235.5,922.5 v1(1240,918)
  Bottom Layer (*.GBL) w7: U2.15 156,1097.54 v1(156,977) ; v1(1240,918) 1240.24,917.76 P3.97 P3.97@1275.79,917.76
pads on no net: P3.3 P3.4 P3.5 P3.6 P3.7 P3.8 P3.9 P3.10 P3.14 P3.16 P3.17 P3.18 P3.19 P3.20 P3.23 P3.24 P3.25 P3.26 P3.27 P3.28 P3.29 P3.30 P3.33 P3.34 P3.35 P3.36 P3.37 P3.38 P3.39 P3.40 P3.43 P3.45 P3.47 P3.49 P3.55 P3.56 P3.57 P3.58 P3.59 P3.60 P3.61 P3.62 P3.65 P3.66 P3.67 P3.68 P3.70 P3.72 P3.86 P3.88 P3.90 P3.92 P3.96 P3.98 P3.100 P3.102 U1.0 U1.3 U1.4 U1.6 U2.0 U2.3 U2.4 U2.6
copper on no net: | length 289.6
  Bottom Layer (*.GBL) w10: 784,608 ccw(c737.9,608) 784,608

## Polygon pours and split planes (outlines as drawn)
+24/48V on Bottom Layer (*.GBL) "Top Layer (*.GTL)-No Net 1" (solid, pour order 7): 830,2910 620,2910 620,2610 830,2610 830,2910
+48V on Bottom Layer (*.GBL) "Top Layer (*.GTL)-No Net 1" (solid, pour order 5): 900,2910 1320,2910 1320,2480 1100,2480 1100,2670 900,2670 900,2910
+24/48V on Bottom Layer (*.GBL) "Bottom Layer-AGND" (solid, pour order 1001): 1120,160 780,160 780,50 1120,50 1120,160
+24V on Bottom Layer (*.GBL) "Bottom Layer-AGND" (solid, pour order 1000): 1280,580 870,580 870,319.19 867.48,316.67 874.14,310 1280,310 1280,580
GND on GND1 (*.GP1) (split plane): 1357.86,20.1 20.1,20.1 20.1,3129.51 1357.86,3129.51
+24/48V on +48V (*.GP2) (split plane): 1357.86,20.1 20.1,20.1 20.1,3129.51 1357.86,3129.51
GND on GND2(*.GP3) (split plane): 1357.86,20.1 20.1,20.1 20.1,3129.51 1357.86,3129.51

## Keep-outs
Top (*.GTL):
  region: 610.24,2996.06 216.54,2996.06 216.54,2602.36 610.24,2602.36 610.24,2799.21
  region: 807.09,547.24 413.39,547.24 413.39,153.54 807.09,153.54 807.09,350.39

## Other copper
Top (*.GTL):
  text "*.GTL - TOP LAYER GERBER DATA" at -341,-1489 h80
Mid-Layer 1 (*.G1):
  text "*.G1 - MID LAYER 1 GERBER DATA" at -341,-1489 h80
Bottom Layer (*.GBL):
  text "LCOGT" at 720,950 h50 r270
  text "c  2011" at 720,590 h50 r270
  text "PCB 175-00017 rev 2" at 413.95,239 h50 r270
  text "*.GBL - BOTTOM LAYER GERBER DATA" at -341,-1489 h80
GND1 (*.GP1) (plane layer: these items are gaps in the copper):
  text "*.GP1 - INTERNAL PLANE LAYER 1 GERBER DATA" at -341,-1489 h80
+48V (*.GP2) (plane layer: these items are gaps in the copper):
  text "*.GP2 - INTERNAL PLANE LAYER 2 GERBER DATA" at -341,-1489 h80
GND2(*.GP3) (plane layer: these items are gaps in the copper):
  text "*.GP3- INTERNAL PLANE LAYER 3 GERBER DATA" at -341,-1489 h80

## Silkscreen, mask and mechanical layers (free items; w line width, h text height)
Top Overlay:
  rectangle: 1103.95,1999 1252.95,2226
  text "780-00020, Rev" at 1184.95,1240 h50 r90
  text "SCH, Two Axis Motor Driver" at 1320.95,715 h50 r90
  text "*.GTO - TOP OVERLAY GERBER DATA" at -341,-1489 h80
Bottom Overlay:
  text "*GBO - BOTTOM OVERLAY GERBER DATA" at -341,-1489 h80
Top Paste:
  text "*.GTP - TOP-SIDE SOLDER PASTE MASK" at -341.01,-1488.99 h80
Bottom Paste:
  text "*.GBP - BOTTOM-SIDE SOLDER PASTE MASK" at -341.01,-1488.99 h80
Top Solder:
  text "*.GTS - TOP SOLDER MASK GERBER DATA" at -341,-1489 h80
Bottom Solder:
  region: 820,520 820,1230 660,1230 660,520
  rectangle: 371,220 491,1192
  text "*.GBS - BOTTOM SOLDER MASK GERBER DATA" at -341,-1489 h80
Mechanical 1:
  the board outline again, w30
Mechanical 2:
  lines w10: -13825,-8024 -13825,7976 7175,7976 7175,-8024 -13825,-8024 ; 3120,-7918 ccw(c3170,-7918) 3170,-7968 3500,-7968 ccw(c3500,-7928) 3540,-7928 3540,-7758 ccw(c3500,-7758) 3500,-7718 3120,-7718 3120,-7918 ; 3120,-7628 ccw(c3170,-7628) 3170,-7678 7070,-7678 ccw(c7070,-7628) 7120,-7628 7120,-7438 ccw(c7070,-7438) 7070,-7388 3120,-7388 3120,-7628 ; 3120,-7298 ccw(c3170,-7298) 3170,-7348 5050,-7348 ccw(c5050,-7298) 5100,-7298 5100,-7148 ccw(c5050,-7148) 5050,-7098 3120,-7098 3120,-7298 ; 3120,-7018 ccw(c3160,-7018) 3160,-7058 3970,-7058 ccw(c3970,-7008) 4020,-7008 4020,-6858 ccw(c3970,-6858) 3970,-6808 3120,-6808 3120,-7018 ; 3580,-7928 ccw(c3620,-7928) 3620,-7968 5580,-7968 ccw(c5580,-7928) 5620,-7928 5620,-7758 ccw(c5580,-7758) 5580,-7718 3580,-7718 3580,-7928 ; 4060,-7008 ccw(c4110,-7008) 4110,-7058 5050,-7058 ccw(c5050,-7008) 5100,-7008 5100,-6858 ccw(c5050,-6858) 5050,-6808 4060,-6808 4060,-7008 ; 5140,-7298 ccw(c5190,-7298) 5190,-7348 7070,-7348 ccw(c7070,-7298) 7120,-7298 7120,-7148 ccw(c7070,-7148) 7070,-7098 5140,-7098 5140,-7298 ; 5140,-7008 ccw(c5190,-7008) 5190,-7058 6130,-7058 ccw(c6130,-7008) 6180,-7008 6180,-6858 ccw(c6130,-6858) 6130,-6808 5140,-6808 5140,-7008 ; 5660,-7918 ccw(c5710,-7918) 5710,-7968 6040,-7968 ccw(c6040,-7928) 6080,-7928 6080,-7758 ccw(c6040,-7758) 6040,-7718 5660,-7718 5660,-7918 ; 6120,-7928 ccw(c6160,-7928) 6160,-7968 7070,-7968 ccw(c7070,-7918) 7120,-7918 7120,-7768 ccw(c7070,-7768) 7070,-7718 6120,-7718 6120,-7928 ; 6220,-7008 ccw(c6270,-7008) 6270,-7058 7070,-7058 ccw(c7070,-7008) 7120,-7008 7120,-6858 ccw(c7070,-6858) 7070,-6808 6220,-6808 6220,-7008
  lines w13: -13174,-3535 -8454,-3535 ; -13174,-3292.4 -8454,-3292.4 ; -13234,-5991 ccw(c-13156,-5991) -13156,-6069 -8472,-6069 ccw(c-8472,-5991) -8394,-5991 -8394,-2777 ccw(c-8472,-2777) -8472,-2699 -13156,-2699 ccw(c-13156,-2777) -13234,-2777 -13234,-5991
  lines w20: -13804.94,-7378.12 cw(c-13755,-7453) -13755,-7363 -13295,-7363 cw(c-13295,-7453) -13205,-7453 -13205,-7503 ccw(c-13195,-7503) -13195,-7513 -10555,-7513 cw(c-10555,-7603) -10465,-7603 -10465,-7943 cw(c-10555,-7943) -10480.12,-7992.94 ; 3076.17,-8007.98 cw(c3170,-7918) 3040,-7918 3040,-6248 cw(c3170,-6248) 3170,-6118 7070,-6118 cw(c7070,-6248) 7158.66,-6152.92 ; -13805,-7943 ccw(c-13755,-7943) -13755,-7993 -10555,-7993 ccw(c-10555,-7943) -10505,-7943 -10505,-7603 ccw(c-10555,-7603) -10555,-7553 -13195,-7553 cw(c-13195,-7503) -13245,-7503 -13245,-7453 ccw(c-13295,-7453) -13295,-7403 -13755,-7403 ccw(c-13755,-7453) -13805,-7453 -13805,-7943 ; -6295,-7844 ccw(c-6165,-7844) -6165,-7974 -1425,-7974 ccw(c-1425,-7844) -1295,-7844 -1295,-6254 ccw(c-1425,-6254) -1425,-6124 -6165,-6124 ccw(c-6165,-6254) -6295,-6254 -6295,-7844 ; 3080,-7918 ccw(c3170,-7918) 3170,-8008 7070,-8008 ccw(c7070,-7918) 7160,-7918 7160,-6248 ccw(c7070,-6248) 7070,-6158 3170,-6158 ccw(c3170,-6248) 3080,-6248 3080,-7918
  lines w24: -3745,-7814 -3595,-7814 ; -3745,-7564 -3595,-7564 ; -3745,-7314 -3595,-7314 ; -3745,-7064 -3595,-7064 ; -3745,-6814 -3595,-6814
  lines w30: -14325,-8524 -14325,8476 7675,8476 7675,-8524 -14325,-8524
  lines w50: 3265,-6659 4915,-6659 ; 3265,-6279 4915,-6279 ; 4915,-6659 4915,-6279 ; 4915,-6659 3255,-6659 3255,-6279 4915,-6279
  text "NOTES (UNLESS OTHERWISE SPECIFIED):" at -13505,7452 h90
  text "GENERAL" at -13405,7252 h90
  text "1)" at -13305,7051.95 h75
  text "PCB IS 6-LAYER, .062\" THICK." at -13105,7051.97 h75
  text "2)" at -13305,6901.95 h75
  text "CONSTRUCTION IS SOLDER-MASK-OVER-BARE-COPPER (SMOBC)." at -13105,6901.95 h75
  text "3)" at -13305,6751.95 h75
  text "ACCEPTABILITY SHALL BE BASED ON IPC-A-600, CLASS 2." at -13105,6751.95 h75
  text "4)" at -13305,6601.95 h75
  text "THE FOLLOWING GERBER RS274X PHOTO TOOL FILES SHALL BE USED TO DEFINE ALL CIRCUIT FEATURES:" at -13105,6601.95 h75
  text "*.GTL - TOP LAYER GERBER DATA" at -12831,6391 h80
  text "*.G1 - MID LAYER 1 GERBER DATA" at -12831,6237.33 h80
  text "*.GP1 - INTERNAL PLANE LAYER 1 GERBER DATA" at -12831,5776.34 h80
  text "*.GP2 - INTERNAL PLANE LAYER 2 GERBER DATA" at -12831,5622.67 h80
  text "*.GP3- INTERNAL PLANE LAYER 3 GERBER DATA" at -12831,5469 h80
  text "*.GBL - BOTTOM LAYER GERBER DATA" at -12831,5008 h80
  text "*.GTO - TOP OVERLAY GERBER DATA" at -12831,4854.34 h80
  text "*.GTS - TOP SOLDER MASK GERBER DATA" at -12831,4700.67 h80
  text "*.GTP - TOP-SIDE SOLDER PASTE MASK" at -12831.01,4547 h80
  text "*GBO - BOTTOM OVERLAY GERBER DATA" at -12831,4393.34 h80
  text "*.GBS - BOTTOM SOLDER MASK GERBER DATA" at -12831,4239.67 h80
  text "*.GBP - BOTTOM-SIDE SOLDER PASTE MASK" at -12831.01,4086 h80
  text "5)" at -13402,3370.23 h75
  text "THE PHOTO TOOL SHALL NOT BE COMPENSATED WITHOUT PRIOR ENGINEERING APPROVAL." at -13202,3370.23 h75
  text "PCB DESIGNER: RICH LOBDILL   PH (805) 880-1621  FAX (805) 961-1792." at -13202,3220.28 h75
  text "FABRICATION TOLERANCES" at -13347,2894 h90
  text "6)" at -13247,2693.95 h75
  text "END PRODUCT CONDUCTOR WIDTHS AND PAD DIAMETERS SHALL NOT VARY MORE THAN" at -13047,2693.95 h75
  text "0.002\" FROM THE 1:1 DIMENSIONS OF THE MASTER ARTWORK." at -13047,2544 h75
  text "7)" at -13247,2393.95 h75
  text "THE CONDUCTIVE PATTERN SHALL BE POSITIONED SO THAT THE LOCATION OF ANY PAD OR" at -13047,2393.95 h75
  text "LAND SHALL BE WITHIN 0.005\" DIAMETER TO THE TRUE POSITION OF THE HOLE IT CIRCUMSCRIBES." at -13047,2244 h75
  text "8)" at -13247,2093.95 h75
  text "ALL DRILL HOLE SIZES AND TOLERANCES APPLY AFTER PLATING." at -13047,2093.95 h75
  text "9)" at -13247,1943.95 h75
  text "THE MINIMUM ANNULAR RING SHALL BE 0.005\"." at -13047,1943.95 h75
  text "10)" at -13302,1793.95 h75
  text "BOW AND TWIST SHALL NOT EXCEED 0.010\" PER INCH." at -13047,1793.95 h75
  text "11)" at -13292,1643.95 h75
  text "FOR PCB ROUTING DIMENSIONS: .XXX = +/-.005\"  .XX = +/-.020\"" at -13047,1643.95 h75
  text "MATERIAL" at -13347,1444 h90
  text "12)" at -13302,1243.95 h75
  text "BASE MATERIAL IS FR4 EPOXY FIBERGLASS" at -13040,1238 h75
  text "SEE STACK-UP LEGEND FOR COPPER CLADDING CALL OUTS" at -13040,1098 h75
  text "13)" at -13302,1093.95 h75
  text "PLATING" at -13347,894 h90
  text "14)" at -13302,698.95 h75
  text "ALL HOLES AND CONDUCTIVE SURFACES SHALL BE PLATED WITH A MINIMUM OF 0.001\" COPPER." at -13047,698.95 h75
  text "15)" at -13302,548.95 h75
  text "AFTER SOLDERMASK, ALL EXPOSED HOLES AND CONDUCTIVE SURFACES SHALL BE COATED" at -13047,548.95 h75
  text "WITH A GOLD IMMERSION PLATING TO PRESERVE SOLDERABILITY." at -13040,398 h75
  text "COATINGS" at -13347,199 h90
  text "16)" at -13297,3.95 h75
  text "THE SOLDERMASK SHALL BE BLACK LIQUID PHOTO-IMAGEABLE PER IPC-SM-840, TYPE-B, CLASS 2." at -13047,3.95 h75
  text "17)" at -13302,-146.05 h75
  text "THE SOLDERMASK REGISTRATION ALLOWANCE IS 0.003\".  THERE SHALL BE NO SOLDERMASK ON" at -13047,-146.05 h75
  text "ANY SOLDER PAD OR LAND." at -13047,-296.05 h75
  text "MARKING" at -13347,-496 h90
  text "18)" at -13302,-691.05 h75
  text "THE LEGEND SHALL BE SCREEN-PRINTED USING PERMANENT YELLOW EPOXY INK." at -13047,-691.05 h75
  text "19)" at -13302,-841.05 h75
  text "THE SCREEN PRINTING REGISTRATION ALLOWANCE IS 0.007\".  THERE SHALL BE NO INK ON ANY" at -13047,-841.05 h75
  text "SOLDER PAD OR LAND." at -13047,-991 h75
  text "20)" at -13312,-1141.05 h75
  text "THE VENDOR CODE AND UL FLAMMABILITY RATING MAY BE ETCHED IN THE FOIL OR MARKED IN" at -13047,-1141.05 h75
  text "PERMANENT EPOXY INK (VENDOR'S OPTION)." at -13047,-1291 h75
  text "ELECTRICAL TESTING" at -13347,-1491 h90
  text "21)" at -13302,-1686.05 h75
  text "ALL BOARDS SHALL BE ELECTRICALLY TESTED TO THE SUPPLIED IPC-D-356A NET LIST" at -13047,-1686.05 h75
  text "FOR CONTINUITY, OPENS AND SHORTS." at -13047,-1836 h75
  text "Layer Stack Up Detail for: 175-00017_rev2, Two Axis Stepper Driver Apps Board.PcbDoc" at -13174,-3034 h56
  text "Layer" at -13174,-3382.9 h56
  text "COPPER THICKNESS" at -11169,-3467 h100
  text "Name" at -13174,-3494.9 h56
  text "Top (*.GTL)" at -13174,-3735.46 h78
  text "1/2 oz,  1 oz Finished" at -11533,-3748 h100
  text "GND1 (*.GP1)" at -13174,-4123.37 h78
  text "1 oz" at -11500,-4144 h100
  text "Mid-Layer 1 (*.G1)" at -13174,-4511.29 h78
  text "2 oz" at -11475,-4524 h100
  text "+48V (*.GP2)" at -13174,-4899.21 h78
  text "2 oz" at -11500,-4912 h100
  text "GND2(*.GP3)" at -13174,-5287.12 h78
  text "1 oz" at -11558,-5301 h100
  text "1/2 oz,  1 oz Finished" at -11516,-5647 h100
  text "Bottom Layer (*.GBL)" at -13174,-5675.04 h78
  text "Las Cumbres Observatory, Inc." at 5085,-6299 h90
  text "Las Cumbres Observatory" at 3315,-6419 h150
  text "PRIMARY PCB SPECIFICATIONS" at -5848,-6434 h200
  text "6740 Cortona Dr." at 5525,-6453 h90
  text "Global Telescope Network" at 3475,-6579 h125
  text "Goleta, CA 93117" at 5475,-6603 h90
  text "(REFER TO COMPLETE SPEC LISTING AT LEFT FOR FURTHER DETAILS)" at -6195,-6639 h100
  text "www.lcogt.net" at 5615,-6749 h90
  text "DATE" at 3140,-6859.8 h32
  text "DESIGNED" at 4080,-6859.8 h32
  text "DRAWN" at 5160,-6859.8 h32
  text "SCALE" at 6240,-6859.8 h32
  text "NUMBER OF LAYERS" at -6095,-6889 h150
  text "6" at -2545,-6889.02 h150
  text "Rich Lobdill" at 5465,-6959 h55
  text "Rich Lobdill" at 4340,-6964 h55
  text "1 : 1" at 6525,-6978 h90
  text "6/20/2011" at 3170,-6985 h90
  text "FINISHED THICKNESS" at -6095,-7139 h150
  text ".062\"" at -2720,-7139 h150
  text "CHECKED/DATE" at 3140,-7149.8 h32
  text "APPROVED/DATE" at 5160,-7149.8 h32
  text "BASE MATERIAL" at -6095,-7389 h150
  text "FR4" at -2795,-7389 h150
  text "TITLE" at 3140,-7439.8 h32
  text "NOTICE" at -13750,-7548 h100
  text "175-00017, Two Axis Stepper Motor Driver" at 3360,-7584 h100
  text "GOLD IMMERSION" at -3289,-7606 h150
  text "PLATING TYPE" at -6095,-7639 h150
  text "THIS DRAWING EMBODIES A PROPRIETARY DESIGN OWNED BY LAS CUMBRES" at -13715,-7663 h60
  text "OBSERVATORY.  IT IS SUBMITTED FOR A SPECIFIC PURPOSE UNDER A CON-" at -13715,-7763 h60
  text "SIZE" at 3140,-7769.8 h32
  text "DOC NO." at 3600,-7769.8 h32
  text "REV" at 5680,-7769.8 h32
  text "SHEET" at 6140,-7769.8 h32
  text "FIDENTIAL RELATIONSHIP, AND EXCEPT FOR PURPOSES EXPRESSLY GRANTED" at -13715,-7858 h60
  text "OF" at 6570,-7873 h60
  text "SOLDER MASK COLOR" at -6095,-7889 h150
  text "BLACK" at -2670,-7889 h150
  text "1" at 6400,-7893 h100
  text "X" at 6800,-7893 h100
  text "2" at 5825,-7906 h130
  text "-" at 4155,-7908 h130
  text "GPT" at 4874.72,-7922.8 h130
  text "C" at 3275,-7924 h100
  text "IN WRITING, ALL RIGHTS ARE RESERVED BY LAS CUMBRES OBSERVATORY." at -13715,-7948 h60
Mechanical 5:
  text "175-00017 rev 2, Two Axis Stepper Motor Driver" at -319.97,-1058.42 h80
  text "LAS CUMBRES OBSERVATORY     6/20/2011" at -319.97,-1208.43 h80
Drill Drawing:
  lines w10: -13825,-8024 -13825,7976 7175,7976 7175,-8024 -13825,-8024 ; 3120,-7918 ccw(c3170,-7918) 3170,-7968 3500,-7968 ccw(c3500,-7928) 3540,-7928 3540,-7758 ccw(c3500,-7758) 3500,-7718 3120,-7718 3120,-7918 ; 3120,-7628 ccw(c3170,-7628) 3170,-7678 7070,-7678 ccw(c7070,-7628) 7120,-7628 7120,-7438 ccw(c7070,-7438) 7070,-7388 3120,-7388 3120,-7628 ; 3120,-7308 ccw(c3160,-7308) 3160,-7348 4580,-7348 ccw(c4580,-7298) 4630,-7298 4630,-7148 ccw(c4580,-7148) 4580,-7098 3120,-7098 3120,-7308 ; 3580,-7928 ccw(c3620,-7928) 3620,-7968 5580,-7968 ccw(c5580,-7928) 5620,-7928 5620,-7758 ccw(c5580,-7758) 5580,-7718 3580,-7718 3580,-7928 ; 4670,-7298 ccw(c4720,-7298) 4720,-7348 6130,-7348 ccw(c6130,-7298) 6180,-7298 6180,-7148 ccw(c6130,-7148) 6130,-7098 4670,-7098 4670,-7298 ; 5660,-7918 ccw(c5710,-7918) 5710,-7968 6040,-7968 ccw(c6040,-7928) 6080,-7928 6080,-7758 ccw(c6040,-7758) 6040,-7718 5660,-7718 5660,-7918 ; 6120,-7928 ccw(c6160,-7928) 6160,-7968 7070,-7968 ccw(c7070,-7918) 7120,-7918 7120,-7768 ccw(c7070,-7768) 7070,-7718 6120,-7718 6120,-7928 ; 6220,-7298 ccw(c6270,-7298) 6270,-7348 7070,-7348 ccw(c7070,-7298) 7120,-7298 7120,-7148 ccw(c7070,-7148) 7070,-7098 6220,-7098 6220,-7298
  lines w20: -13799.94,-7393.12 cw(c-13750,-7468) -13750,-7378 -13290,-7378 cw(c-13290,-7468) -13200,-7468 -13200,-7518 ccw(c-13190,-7518) -13190,-7528 -10550,-7528 cw(c-10550,-7618) -10460,-7618 -10460,-7958 cw(c-10550,-7958) -10475.12,-8007.94 ; 3074.92,-8006.66 cw(c3170,-7918) 3040,-7918 3040,-7098 cw(c3120,-7098) 3120,-7018 7070,-7018 cw(c7070,-7148) 7158.66,-7052.92 ; -13800,-7958 ccw(c-13750,-7958) -13750,-8008 -10550,-8008 ccw(c-10550,-7958) -10500,-7958 -10500,-7618 ccw(c-10550,-7618) -10550,-7568 -13190,-7568 cw(c-13190,-7518) -13240,-7518 -13240,-7468 ccw(c-13290,-7468) -13290,-7418 -13750,-7418 ccw(c-13750,-7468) -13800,-7468 -13800,-7958 ; 3080,-7918 ccw(c3170,-7918) 3170,-8008 7070,-8008 ccw(c7070,-7918) 7160,-7918 7160,-7148 ccw(c7070,-7148) 7070,-7058 3120,-7058 ccw(c3120,-7098) 3080,-7098 3080,-7918
  lines w30: -14325,-8524 -14325,8476 7675,8476 7675,-8524 -14325,-8524
  text ".Legend" at -3351,-3907 h100
  text "DESIGNED" at 3140,-7149.8 h32
  text "DRAWN" at 4690,-7149.8 h32
  text "SCALE" at 6240,-7149.8 h32
  text "Rich Lobdill" at 3626,-7246 h55
  text "Rich Lobdill" at 5187,-7248 h55
  text "1 : 1" at 6525,-7268 h90
  text "TITLE" at 3140,-7439.8 h32
  text "NOTICE" at -13745,-7563 h100
  text "175-00017, Two Axis Stepper Motor Driver" at 3357,-7584 h100
  text "THIS DRAWING EMBODIES A PROPRIETARY DESIGN OWNED BY LAS CUMBRES" at -13710,-7678 h60
  text "SIZE" at 3140,-7769.8 h32
  text "DOC NO." at 3600,-7769.8 h32
  text "REV" at 5680,-7769.8 h32
  text "SHEET" at 6140,-7769.8 h32
  text "OBSERVATORY.  IT IS SUBMITTED FOR A SPECIFIC PURPOSE UNDER A CON-" at -13710,-7778 h60
  text "FIDENTIAL RELATIONSHIP, AND EXCEPT FOR PURPOSES EXPRESSLY GRANTED" at -13710,-7873 h60
  text "OF" at 6570,-7873 h60
  text "2" at 6385,-7893 h100
  text "X" at 6800,-7893 h100
  text "-" at 4155,-7908 h130
  text "2" at 5820,-7908 h130
  text "C" at 3275,-7924 h120
  text "GD1" at 4975,-7924 h120
  text "IN WRITING, ALL RIGHTS ARE RESERVED BY LAS CUMBRES OBSERVATORY." at -13710,-7963 h60

## Dimensions
0,0 to 0,3149.61 on Mechanical 2
0,0 to 1377.95,0 on Mechanical 2

## Text inside footprints (layer, text, board x,y; h text height)
P3: Bottom Overlay "1" at 1357.28,2366.14 h30 r90; Bottom Overlay "104" at 1081.69,745.08 h30; Bottom Overlay "103" at 1463.58,922.88 h30 r90
U1: Top Overlay "1" at 1165.35,562.99 h40 r90
U2: Top Overlay "1" at -141.73,2586.61 h40 r270